# Altium PCB FP_A.PcbDoc (part 1 of 2)
Units mm, origin at the board's own origin, x right, y up, seen from the top; angles counter-clockwise.
Board outline 100 x 100 mm, 2 copper layers (Top Layer, Bottom Layer); 46 components, 104 nets, 431 pads, 841 vias.
Unrouted connection lines stored in the file: 843.
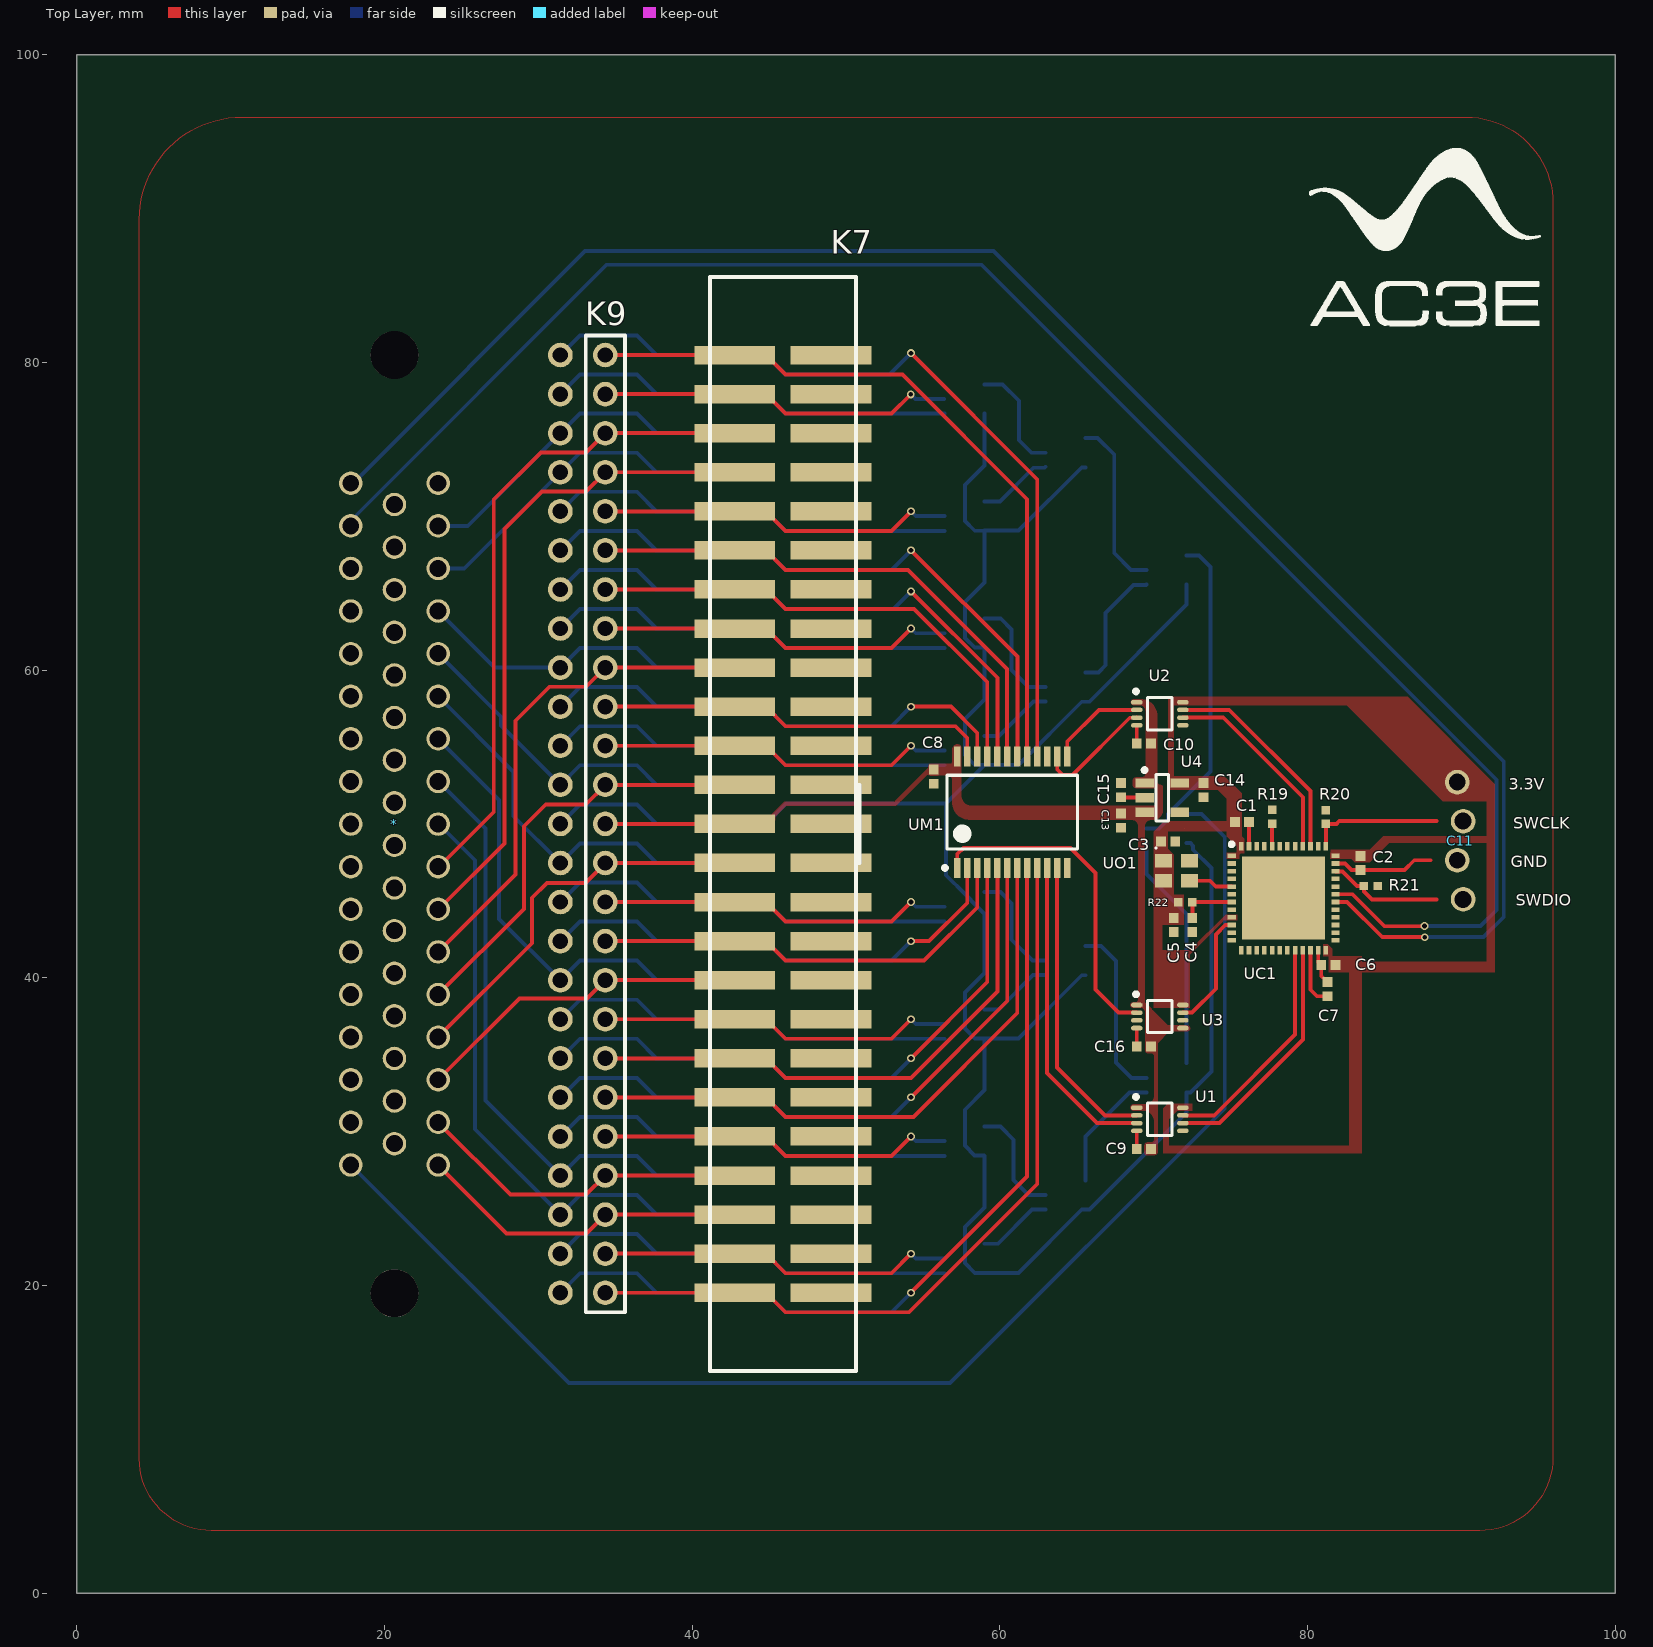
[diagram p0: Top Layer view]
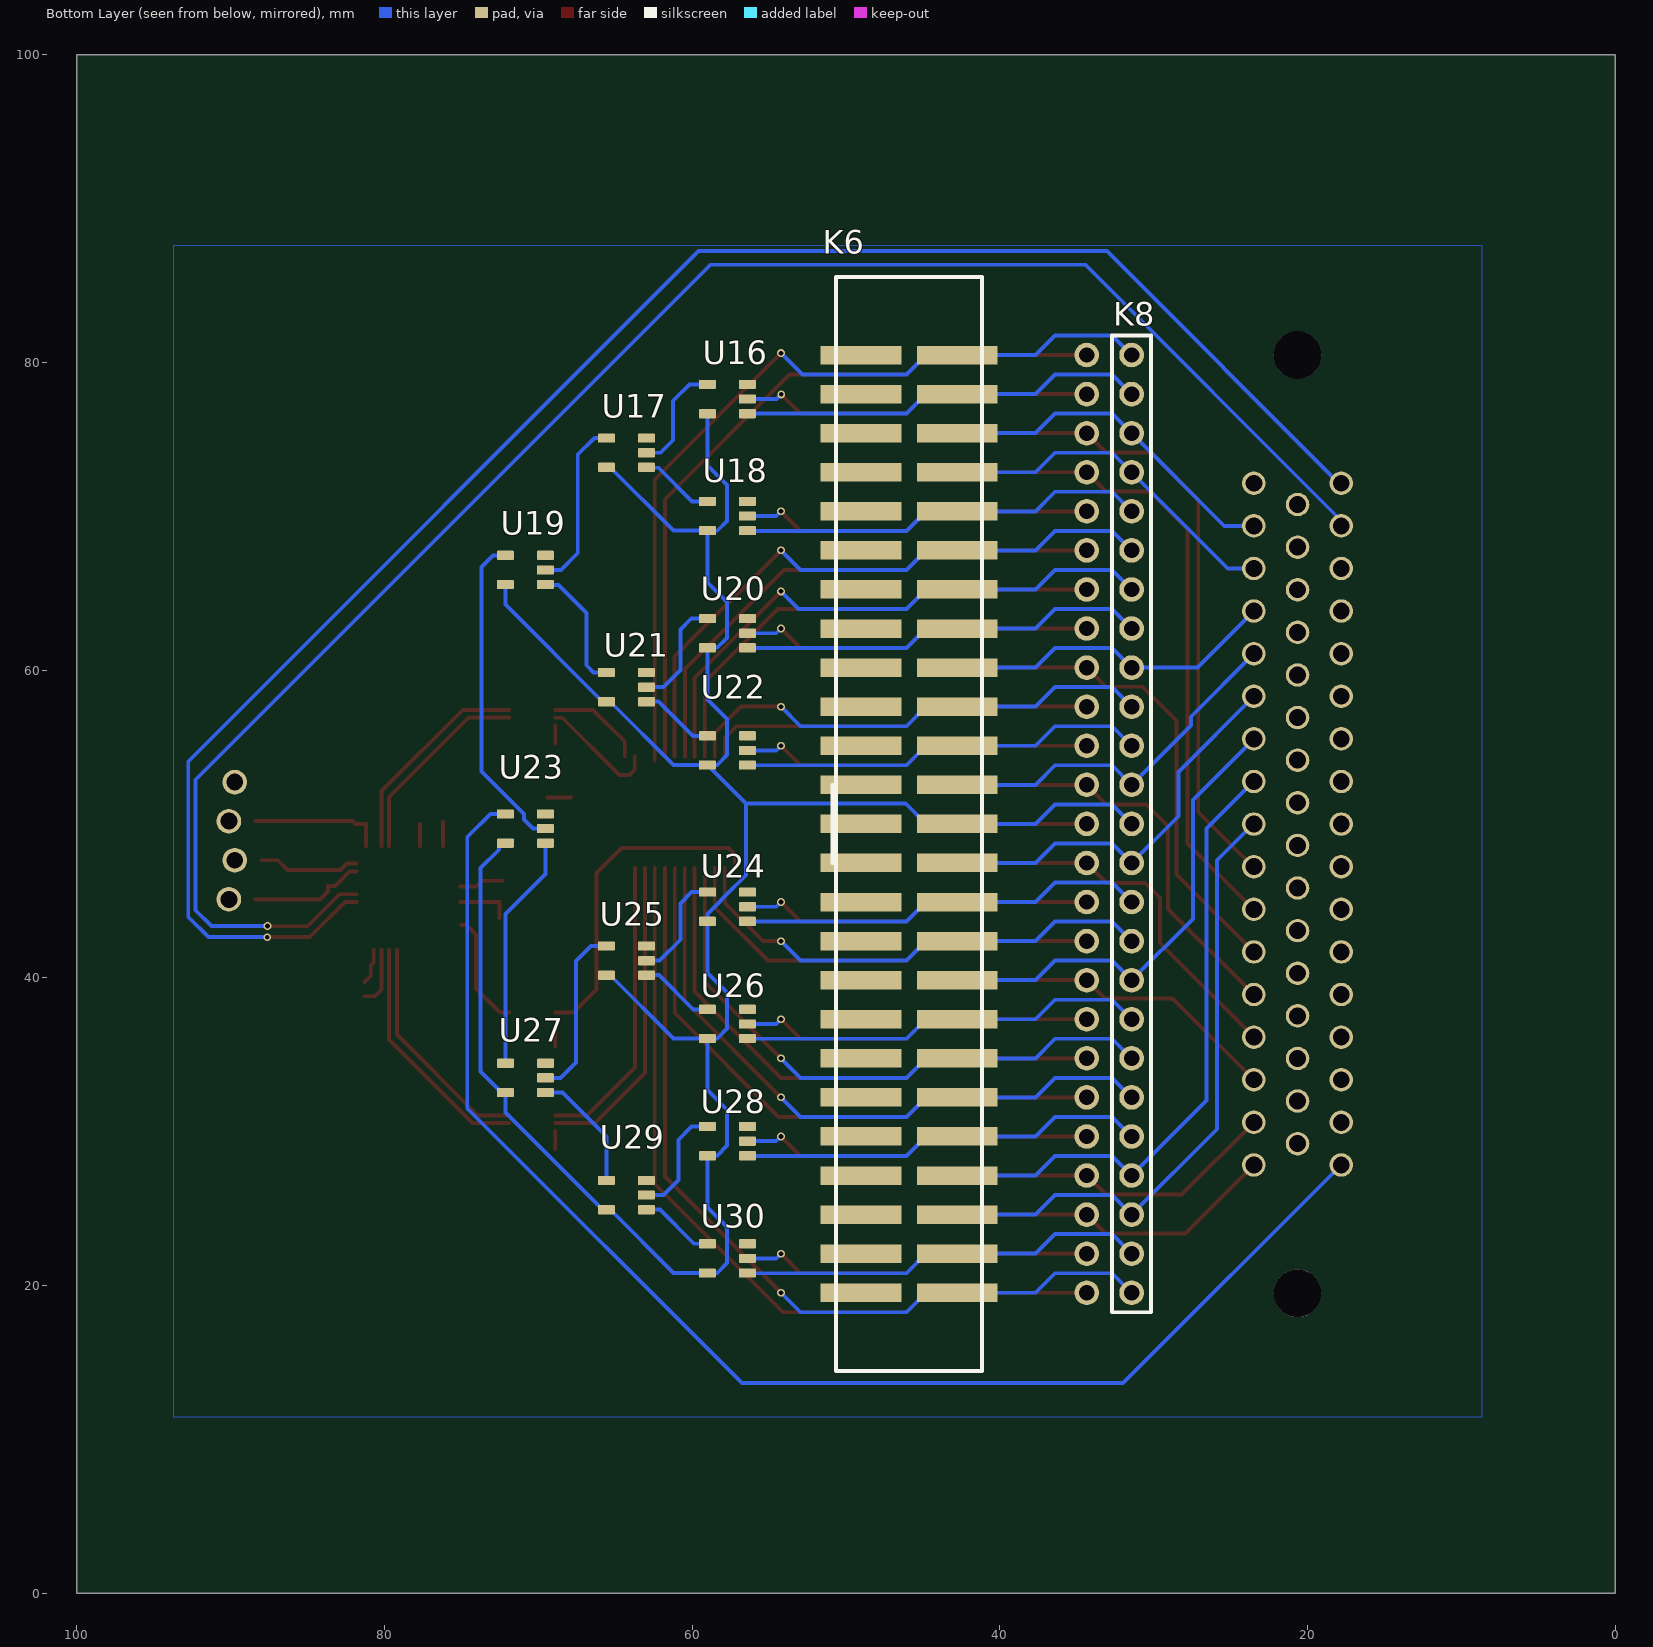
[diagram p1: Bottom Layer view, seen from below]
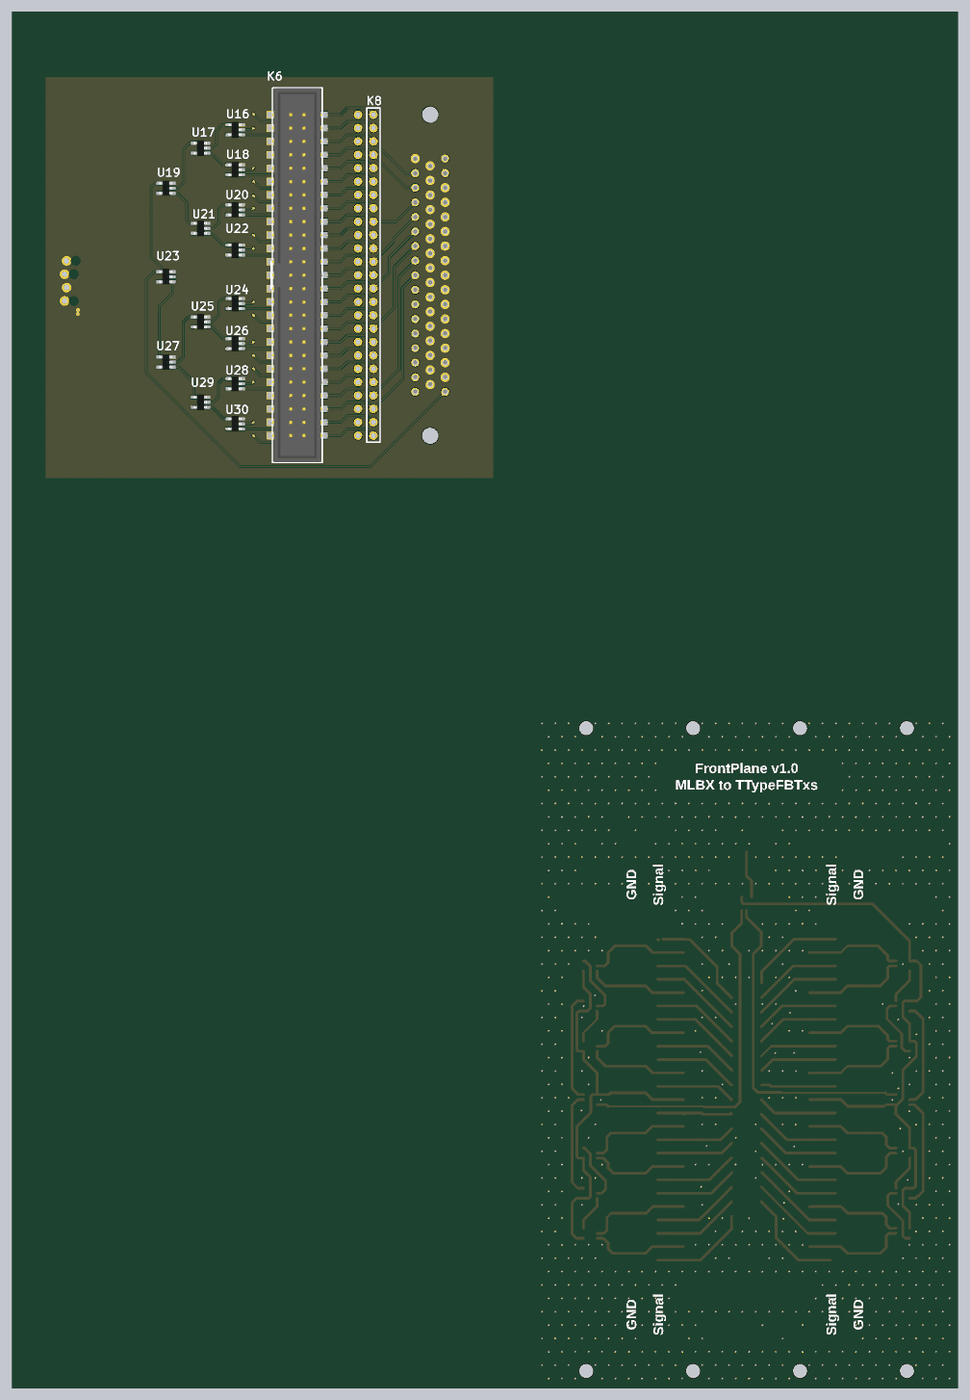
[diagram p3: 3D render of the assembled board from below, using the file's embedded part models]

## Layer stack, top to bottom
Top Solder: solder mask 0.0102, Solder Resist, Dk 3.5
Top Layer: signal copper 0.0356
Dielectric 1: dielectric 0.32, FR-4, Dk 4.8
Bottom Layer: signal copper 0.0356
Bottom Solder: solder mask 0.0102, Solder Resist, Dk 3.5

## Board outline
0,0.006 0,100.006 100,100.006 100,0.006

## Design rules (kind name [scope] priority, off if disabled: settings)
Clearance [All] p1: gap=0.152 ignorepadtopadclearanceinfootprint=FALSE
PlaneConnect [All] p1: pad.planeconnectstyle=Relief pad.reliefexpansion=0.508 pad.reliefentries=4 pad.reliefconductorwidth=0.254 pad.reliefairgap=0.254 via.planeconnectstyle=Direct via.reliefexpansion=0.508 via.reliefentries=4 via.reliefconductorwidth=0.254 via.reliefairgap=0.254
PolygonConnect [All] p1: connectstyle=Direct reliefconductorwidth=0.254 reliefentries=4 polygonreliefangle="90 Angle" airgapwidth=0.254
RoutingVias [All] p1: holewidth=0.711 width=1.27 viastyle="Through Hole" minholewidth=0.711 minwidth=1.27 maxholewidth=0.711 maxwidth=1.27
SolderMaskExpansion [All] p1: expansion=0.102 istentingtop=FALSE
Width [All] p1: maxlimit=1.27 minlimit=0.254 preferedwidth=0.254
29 further rules are at their usual default settings.

## Components (designator, comment, footprint, x,y, rotation, side; value= is the part's Value field where it differs from the comment)
* "163A11759X" 163A11759X 20.645,50 r270 top
C1 "C_100nF" CAPC1005X02N 75.738,50.133 r0 top
C2 "C_100nF" CAPC1005X02N 83.439,47.473 r90 top
C3 "C_100nF" CAPC1005X02N 70.949,48.87 r180 top
C4 "C_100nF" CAPC1005X02N 72.514,43.434 r90 top
C5 "C_100nF" CAPC1005X02N 71.302,43.434 r90 top
C6 "C_100nF" CAPC1005X02N 81.356,40.843 r180 top
C7 "C_4.7uF" CAPC1005X02N 81.305,39.268 r90 top
C8 "C_100nF" CAPC1005X02N 55.703,53.083 r270 top
C9 "C_100nF" CAPC1005X02N 69.364,28.884 r0 top locked
C10 "C_100nF" CAPC1005X02N 69.364,55.241 r0 top
C11 "test_pins" Test_pins 89.738,52.73 r270 top
C13 "C_100nF" CAPC1005X02N 67.884,50.223 r270 top
C14 "C_100nF" CAPC1005X02N 73.232,52.205 r270 top
C15 "C_100nF" CAPC1005X02N 67.884,52.204 r90 top
C16 "C_100nF" CAPC1005X02N 69.364,35.535 r0 top
K6 "3020-50-0300-00-TR" IDC_2x50 45.897,50.013 r270 bottom
K7 "3020-50-0300-00-TR" IDC_2x50 45.897,50.013 r90 top
K8 "PH_F_1x25" PH_F_1x25 31.433,77.953 r270 bottom
K9 "PH_F_1x25" PH_F_1x25 34.354,22.073 r90 top
R19 "R_40kOhm" Resist 77.698,50.47 r90 top
R20 "R_40kOhm" Resist 81.198,50.463 r90 top
R21 "R_40kOhm" Resist 84.118,45.974 r0 top
R22 "R_40kOhm" Resist 72.064,44.933 r180 top
U1 "SN74LXC2T45-Q1" SN74LXC2T45-Q1 70.403,30.81 r0 top locked
U2 "SN74LXC2T45-Q1" SN74LXC2T45-Q1 70.403,57.171 r0 top
U3 "SN74LXC2T45-Q1" SN74LXC2T45-Q1 70.403,37.49 r0 top locked
U4 "LDO" LDK120-5N-200mA 70.558,51.714 r0 top
U16 "OR Logic" sot23 59.008,77.633 r270 bottom
U17 "SN74LVC1G00" sot23 65.575,74.143 r270 bottom
U18 "SN74AHC1G32DBVR" sot23 59.008,70.029 r270 bottom
U19 "SN74LVC1G00" sot23 72.142,66.523 r270 bottom
U20 "SN74LVC1G00" sot23 59.008,62.408 r270 bottom
U21 "SN74LVC1G00" sot23 65.575,58.903 r270 bottom
U22 "SN74LVC1G00" sot23 59.008,54.788 r270 bottom
U23 "SN74LVC1G00" sot23 72.142,49.708 r270 bottom
U24 "SN74LVC1G00" sot23 59.008,44.628 r270 bottom
U25 "SN74LVC1G00" sot23 65.575,41.123 r270 bottom
U26 "SN74LVC1G00" sot23 59.008,37.008 r270 bottom
U27 "SN74LVC1G00" sot23 72.142,33.503 r270 bottom
U28 "SN74LVC1G00" sot23 59.008,29.388 r270 bottom
U29 "SN74LVC1G00" sot23 65.575,25.883 r270 bottom
U30 "SN74LVC1G00" sot23 59.008,21.768 r270 bottom
UC1 "STM32F401CCU6" STM32F401CCU6-UFQFPN48 78.448,45.187 r0 top
UM1 "CD74HC4067" CD74HC4067SM96 60.809,50.775 r90 top
UO1 "Oscil SG-210STF 25MHz" SG-210STF-25.0000M 71.479,46.965 r0 top

## Footprints (in the part's own frame and the unit in brackets; to place one, negate y for a bottom-side part, rotate by r counter-clockwise, add the part's x,y. Pads: shape width x height; smd on the part's side, far side on the other; paste and mask are expansions set on the pad)
163A11759X [mm]
  round 1.524 hole 1.1: 1(-22.16,2.84) 2(-19.39,2.84) 3(-16.62,2.84) 4(-13.85,2.84) 5(-11.08,2.84) 6(-8.31,2.84) 7(-5.54,2.84) 8(-2.77,2.84) 9(0,2.84) 10(2.77,2.84) 11(5.54,2.84) 12(8.31,2.84) 13(11.08,2.84) 14(13.85,2.84) 15(16.62,2.84) 16(19.39,2.84) 17(22.16,2.84) 18(-20.775,0) 19(-18.005,0) 20(-15.235,0) 21(-12.465,0) 22(-9.695,0) 23(-6.925,0) 24(-4.155,0) 25(-1.385,0) 26(1.385,0) 27(4.155,0) 28(6.925,0) 29(9.695,0) 30(12.465,0) 31(15.235,0) 32(18.005,0) 33(20.775,0) 34(-22.16,-2.84) 35(-19.39,-2.84) 36(-16.62,-2.84) 37(-13.85,-2.84) 38(-11.08,-2.84) 39(-8.31,-2.84) 40(-5.54,-2.84) 41(-2.77,-2.84) 42(0,-2.84) 43(2.77,-2.84) 44(5.54,-2.84) 45(8.31,-2.84) 46(11.08,-2.84) 47(13.85,-2.84) 48(16.62,-2.84) 49(19.39,-2.84) 50(22.16,-2.84)
  round 3.1 hole 3.1 unplated: ""(-30.5,0) ""(30.5,0)
  body extent -33.58,-16.59 33.52,5.15, height 16.68
CAPC1005X02N [mm] "Chip Capacitor, 2-Leads, Body 1,00x0,50mm, IPC Medium Density"
  rect 0.64x0.64 smd: 1(-0.46,0) 2(0.46,0)
  body extent -0.55,-0.3 0.55,0.3, height 0.2
CD74HC4067SM96 [mm]
  rect 1.31x0.45 smd: 1(-3.625,3.575) 2(-3.625,2.925) 3(-3.625,2.275) 4(-3.625,1.625) 5(-3.625,0.975) 6(-3.625,0.325) 7(-3.625,-0.325) 8(-3.625,-0.975) 9(-3.625,-1.625) 10(-3.625,-2.275) 11(-3.625,-2.925) 12(-3.625,-3.575) 13(3.625,-3.575) 14(3.625,-2.925) 15(3.625,-2.275) 16(3.625,-1.625) 17(3.625,-0.975) 18(3.625,-0.325) 19(3.625,0.325) 20(3.625,0.975) 21(3.625,1.625) 22(3.625,2.275) 23(3.625,2.925) 24(3.625,3.575)
  silkscreen extent -3.75,-4.25 2.4,4.5, body extent -3.9,-4.25 3.9,4.25, height 2
IDC_2x50 [mm]
  rect 1.2x5.25 smd: 1(-30.48,3.125) 2(-30.48,-3.125) 3(-27.94,3.125) 4(-27.94,-3.125) 5(-25.4,3.125) 6(-25.4,-3.125) 7(-22.86,3.125) 8(-22.86,-3.125) 9(-20.32,3.125) 10(-20.32,-3.125) 11(-17.78,3.125) 12(-17.78,-3.125) 13(-15.24,3.125) 14(-15.24,-3.125) 15(-12.7,3.125) 16(-12.7,-3.125) 17(-10.16,3.125) 18(-10.16,-3.125) 19(-7.62,3.125) 20(-7.62,-3.125) 21(-5.08,3.125) 22(-5.08,-3.125) 23(-2.54,3.125) 24(-2.54,-3.125) 25(0,3.125) 26(0,-3.125) 27(2.54,3.125) 28(2.54,-3.125) 29(5.08,3.125) 30(5.08,-3.125) 31(7.62,3.125) 32(7.62,-3.125) 33(10.16,3.125) 34(10.16,-3.125) 35(12.7,3.125) 36(12.7,-3.125) 37(15.24,3.125) 38(15.24,-3.125) 39(17.78,3.125) 40(17.78,-3.125) 41(20.32,3.125) 42(20.32,-3.125) 43(22.86,3.125) 44(22.86,-3.125) 45(25.4,3.125) 46(25.4,-3.125) 47(27.94,3.125) 48(27.94,-3.125) 49(30.48,3.125) 50(30.48,-3.125)
  silkscreen extent -35.56,-4.98 35.56,4.75, body extent -35.56,-4.8 35.56,4.8, height 10.32
LDK120-5N-200mA [mm] "SOT23, 5-Leads, Body 2,95x2,80mm, Pitch 0,95mm, IPC Medium Density"
  rect 1.2x0.6 smd: 1(-1.15,0.95) 2(-1.15,0) 3(-1.15,-0.95) 4(1.15,-0.95) 5(1.15,0.95)
  silkscreen extent -1.27,-1.5 0.4,1.92, body extent -1.45,-1.5 1.45,1.5, height 1.45
PH_F_1x25 [mm]
  round 1.6 hole 1: 1(-2.54,0) 2(0,0) 3(2.54,0) 4(5.08,0) 5(7.62,0) 6(10.16,0) 7(12.7,0) 8(15.24,0) 9(17.78,0) 10(20.32,0) 11(22.86,0) 12(25.4,0) 13(27.94,0) 14(30.48,0) 15(33.02,0) 16(35.56,0) 17(38.1,0) 18(40.64,0) 19(43.18,0) 20(45.72,0) 21(48.26,0) 22(50.8,0) 23(53.34,0) 24(55.88,0) 25(58.42,0)
  silkscreen extent -3.81,-1.27 59.69,1.27, body extent -3.81,-1.27 59.69,1.27, height 8
Resist [mm]
  rect 0.55x0.55 smd: 1(-0.45,0) 2(0.45,0)
  body extent -0.55,-0.27 0.55,0.28, height 0.3
SG-210STF-25.0000M [mm]
  rect 1.1x0.9 smd: 1(-0.85,0.65) 2(0.85,0.65) 3(0.85,-0.65) 4(-0.85,-0.65)
  silkscreen extent -1.37,1.43 -1.28,1.52, body extent -1.33,-1.07 1.4,1.08, height 0.8
SN74LXC2T45-Q1 [mm]
  oval 0.75x0.3 smd: 1(-1.499,0.75) 2(-1.499,0.25) 3(-1.499,-0.25) 4(-1.499,-0.75) 5(1.499,-0.75) 6(1.499,-0.25) 7(1.499,0.25) 8(1.499,0.75)
  silkscreen extent -1.67,-1.05 0.8,1.57, body extent -1.55,-1.05 1.55,1.05, height 0.9
sot23 [mm]
  rrect20% 0.6x1.1 smd mask+0.01: 1(0.95,2.6) 2(0,2.6) 3(-0.95,2.6) 4(-0.95,0) 5(0.95,0)
  body extent -1.5,0.02 1.5,2.52, height 1.11
STM32F401CCU6-UFQFPN48 [mm] "TSQFP, 48-Leads, Body 6,00x6,00mm, Pitch 0,50mm, Thermal Pad 5,40x5,40mm, IPC Medium Density"
  rect 0.55x0.3 smd mask+0.05: 1(-3.375,2.75) 2(-3.375,2.25) 3(-3.375,1.75) 4(-3.375,1.25) 5(-3.375,0.75) 6(-3.375,0.25) 7(-3.375,-0.25) 8(-3.375,-0.75) 9(-3.375,-1.25) 10(-3.375,-1.75) 11(-3.375,-2.25) 12(-3.375,-2.75) 25(3.375,-2.75) 26(3.375,-2.25) 27(3.375,-1.75) 28(3.375,-1.25) 29(3.375,-0.75) 30(3.375,-0.25) 31(3.375,0.25) 32(3.375,0.75) 33(3.375,1.25) 34(3.375,1.75) 35(3.375,2.25) 36(3.375,2.75)
  rect 0.3x0.55 smd mask+0.05: 13(-2.75,-3.375) 14(-2.25,-3.375) 15(-1.75,-3.375) 16(-1.25,-3.375) 17(-0.75,-3.375) 18(-0.25,-3.375) 19(0.25,-3.375) 20(0.75,-3.375) 21(1.25,-3.375) 22(1.75,-3.375) 23(2.25,-3.375) 24(2.75,-3.375) 37(2.75,3.375) 38(2.25,3.375) 39(1.75,3.375) 40(1.25,3.375) 41(0.75,3.375) 42(0.25,3.375) 43(-0.25,3.375) 44(-0.75,3.375) 45(-1.25,3.375) 46(-1.75,3.375) 47(-2.25,3.375) 48(-2.75,3.375)
  rect 5.4x5.4 smd mask+0.05: 49(0,0)
  silkscreen extent -3.5,3.38 -3.25,3.62, body extent -3.64,-3.64 3.64,3.64, height 0.6
Test_pins [mm]
  round 1.6 hole 1.1: 1(0,0) 2(2.54,0.381) 3(5.08,0) 4(7.62,0.381)

## Part data
U16: library part SN74AHC1G32DBVR

## Free pads (board coordinates)
  round 2.7 hole 2.7 unplated: ""(-69.977,-158.14) ""(-69.977,-36.04) ""(-49.657,-158.14) ""(-49.657,-36.04) ""(-29.337,-158.14) ""(-29.337,-36.04) ""(-9.017,-158.14) ""(-9.017,-36.04)

## Via types
v1: diameter 0.45, hole 0.3, Top Layer to Bottom Layer, tented both sides, 823 vias
v2: diameter 0.5, hole 0.3, Top Layer to Bottom Layer, 18 vias

## Nets (pads, with @x,y where several pads share a name; then routed paths per layer and width w, separated by ;. In a path a pad name is that pad's centre, name@x,y a point inside that pad or via, vN(x,y) a via of type N, cw(c..) or ccw(c..) an arc to the next point about the centre after c; other vN are vias at no path point)
3.3V: C1.1 C2.2 C3.2 C5.2 C6.1 C11.1 C14.1 R22.2 U1.8 U2.8 U3.8 U4.5 UC1.1 UC1.9 UC1.24 UC1.36 UC1.48 UO1.1 UO1.4
5V_C1: K6.25 K8.13 U16.5 U17.5 U18.5 U19.5 U20.5 U21.5 U22.5 U23.5 U24.5 U25.5 U26.5 U27.5 U28.5 U29.5 U30.5 | length 165
  Bottom Layer w0.254: K8.13@31.433,50.013 32.703,51.283 36.411,51.283 37.681,50.013 K6.25@42.772,50.013 44.797,50.013 46.118,51.333 56.504,51.333 ; U28.5@58.988,28.458 58.359,28.458 57.724,29.093 57.724,31.43 58.998,32.704 U26.5@58.998,36.068 ; U30.5@58.998,20.828 58.369,20.828 57.734,21.463 57.734,23.8 59.008,25.074 U28.5@59.008,28.438 ; U22.5@58.998,53.848 58.369,53.848 57.734,54.483 57.734,56.82 59.008,58.094 U20.5@59.008,61.458 ; U20.5@58.998,61.469 58.369,61.469 57.734,62.104 57.734,64.441 59.008,65.714 U18.5@59.008,69.079 61.21,69.078 65.325,73.193 U17.5@65.575,73.193 ; U18.5@58.998,69.073 58.369,69.073 57.734,69.708 57.734,72.045 59.008,73.318 U16.5@59.008,76.683 ; U30.5@59.008,20.818 61.21,20.818 65.325,24.933 U29.5@65.575,24.933 65.825,24.933 72.142,31.25 U27.5@72.142,32.553 72.392,32.553 73.762,33.923 73.762,47.138 72.565,48.335 72.565,48.585 72.392,48.758 U23.5@72.142,48.758 ; U25.5@65.575,40.173 65.325,40.173 61.21,36.058 U26.5@59.008,36.058 U26.5@58.998,36.068 ; U19.5@72.142,65.573 72.142,64.27 65.825,57.953 U21.5@65.575,57.953 65.325,57.953 61.21,53.838 U22.5@59.008,53.838 56.504,51.333 ; 56.504,51.333 56.504,46.671 57.018,46.157 57.038,46.157 57.237,45.958 57.237,45.938 59.008,44.167 U24.5@59.008,43.678 59.008,40.314 57.734,39.04 57.734,36.703 58.369,36.068 U26.5@58.998,36.068
5V_C2: C8.1 C9.2 C10.2 C13.1 C16.2 K7.25 K9.13 U1.1 U2.1 U3.1 U3.5 U4.1 U4.3 UM1.24 | length 8.4
  Top Layer w0.254: K9.13@34.354,50.013 K7.25@42.772,50.013
DIO1_ch1_T_K3_L1: K6.49 K8.25 UM1.8 | length 55.6
  Top Layer w0.254: v2@54.216,19.545 61.773,27.102 UM1.8@61.773,47.15
  Bottom Layer w0.254: K8.25@31.433,19.533 32.703,20.803 36.411,20.803 37.681,19.533 K6.49@42.772,19.533 44.797,19.533 46.067,18.263 52.959,18.263 v2(54.229,19.533)
DIO1_ch2_P_K3_L1: *.9 K6.45 K8.23 | length 41.1
  Bottom Layer w0.254: *.9@23.509,50.024 25.883,47.65 25.883,30.163 K8.23@31.433,24.613 32.703,25.883 36.411,25.883 37.681,24.613 K6.45@42.772,24.613
DIO1_ch3_P_K4_H1: *.8 K6.43 K8.22 | length 41.3
  Bottom Layer w0.254: *.8@23.496,52.78 26.568,49.708 26.568,32.018 K8.22@31.433,27.153 32.703,28.423 36.411,28.423 37.681,27.153 K6.43@42.772,27.153
DIO1_ch4_T_K4_H1: K6.39 K8.20 UM1.6 | length 42.4
  Top Layer w0.254: v2(54.229,32.233) 60.484,38.488 UM1.6@60.484,47.15
  Bottom Layer w0.254: K8.20@31.433,32.233 32.703,33.503 36.411,33.503 37.681,32.233 K6.39@42.772,32.233 44.797,32.233 46.067,30.963 52.959,30.963 v2(54.229,32.233)
DIO1_ch5_T_K6_H1: K6.37 K8.19 UM1.4 | length 39.3
  Top Layer w0.254: v2(54.229,34.773) 59.184,39.728 UM1.4@59.184,47.15
  Bottom Layer w0.254: K8.19@31.433,34.773 32.703,36.043 36.411,36.043 37.681,34.773 K6.37@42.772,34.773 44.797,34.773 46.067,33.503 52.959,33.503 v2(54.229,34.773)
DIO1_ch6_P_K6_H1: *.7 K6.33 K8.17 | length 31.4
  Bottom Layer w0.254: *.7@23.483,55.537 27.452,51.567 27.452,43.834 K8.17@31.433,39.853 32.703,41.123 36.411,41.123 37.681,39.853 K6.33@42.772,39.853
DIO1_ch7_T_K6_L1: K6.31 K8.16 UM1.2 | length 31.9
  Top Layer w0.254: v2(54.229,42.393) 55.397,42.393 57.884,44.879 UM1.2@57.884,47.15
  Bottom Layer w0.254: K8.16@31.433,42.393 32.703,43.663 36.411,43.663 37.681,42.393 K6.31@42.772,42.393 44.797,42.393 46.067,41.123 52.959,41.123 v2(54.229,42.393)
DIO1_ch8_P_K6_L1: *.6 K6.27 K8.14 | length 26.5
  Bottom Layer w0.254: *.6@23.485,58.31 28.397,53.398 28.397,50.509 K8.14@31.433,47.473 32.703,48.743 36.411,48.743 37.681,47.473 K6.27@42.772,47.473
DIO1_ch9_P_K5_L1: *.5 K6.23 K8.12 | length 24.2
  Bottom Layer w0.254: *.5@23.485,61.08 27.584,56.981 27.584,56.402 K8.12@31.433,52.553 32.703,53.823 36.411,53.823 37.681,52.553 K6.23@42.772,52.553
DIO1_ch10_T_K5_L1: K6.19 K8.10 UM1.22 | length 31.4
  Top Layer w0.254: v2(54.229,57.633) 56.82,57.633 58.534,55.918 UM1.22@58.534,54.4
  Bottom Layer w0.254: K8.10@31.433,57.633 32.703,58.903 36.411,58.903 37.681,57.633 K6.19@42.772,57.633 44.797,57.633 46.067,56.363 52.959,56.363 v2(54.229,57.633)
DIO1_ch11_P_K5_H1: *.4 K6.17 K8.9 | length 21.9
  Bottom Layer w0.254: *.4@23.485,63.85 27.162,60.173 K8.9@31.433,60.173 32.703,61.443 36.411,61.443 37.681,60.173 K6.17@42.772,60.173
DIO1_ch12_T_K5_H1: K6.13 K8.7 UM1.20 | length 37.9
  Top Layer w0.254: v2(54.229,65.126) 59.842,59.512 UM1.20@59.842,54.4
  Bottom Layer w0.254: K8.7@31.433,65.253 32.703,66.523 36.411,66.523 37.681,65.253 K6.13@42.772,65.253 44.797,65.253 46.067,63.983 53.086,63.983 v2(54.229,65.126)
DIO1_ch13_T_K2_H1: K6.11 K8.6 UM1.18 | length 41.2
  Top Layer w0.254: v2(54.229,67.793) 61.138,60.884 UM1.18@61.138,54.4
  Bottom Layer w0.254: K8.6@31.433,67.793 32.703,69.063 36.411,69.063 37.681,67.793 K6.11@42.772,67.793 44.797,67.793 46.067,66.523 52.959,66.523 v2(54.229,67.793)
DIO1_ch14_P_K2_H1: *.3 K6.7 K8.4 | length 22.9
  Bottom Layer w0.254: *.3@23.485,66.62 25.18,66.62 K8.4@31.433,72.873 32.703,74.143 36.411,74.143 37.681,72.873 K6.7@42.772,72.873
DIO1_ch15_P_K1_L1: *.2 K6.5 K8.3 | length 22.8
  Bottom Layer w0.254: *.2@23.485,69.39 25.41,69.39 K8.3@31.433,75.413 32.703,76.683 36.411,76.683 37.681,75.413 K6.5@42.772,75.413
DIO1_ch16_T_K1_L1: K6.1 K8.1 UM1.16 | length 54.9
  Top Layer w0.254: v2(54.229,80.62) 62.434,72.415 UM1.16@62.434,54.4 UM1.16@62.434,54.115
  Bottom Layer w0.254: K8.1@31.433,80.493 32.703,81.763 36.411,81.763 37.681,80.493 K6.1@42.772,80.493 44.797,80.493 46.067,79.223 52.832,79.223 v2(54.229,80.62)
DIO1_ch17_T_K1_L2: K7.1 K9.1 UM1.9 | length 52.6
  Top Layer w0.254: K9.1@34.354,19.533 K7.1@42.772,19.533 ; K7.1@42.772,19.533 44.797,19.533 46.067,18.263 54.102,18.263 62.433,26.594 UM1.9@62.434,47.15
DIO1_ch18_P_K1_L2: *.17 K7.5 K9.3 | length 21.6
  Top Layer w0.254: *.17@23.485,27.84 27.932,23.393 33.134,23.393 K9.3@34.354,24.613 K7.5@42.772,24.613
DIO1_ch19_P_K2_H2: *.16 K7.7 K9.4 | length 21.7
  Top Layer w0.254: *.16@23.485,30.61 28.187,25.908 33.109,25.908 K9.4@34.354,27.153 K7.7@42.772,27.153
DIO1_ch20_T_K2_H2: K7.11 K9.6 UM1.7 | length 39.5
  Top Layer w0.254: K9.6@34.354,32.233 K7.11@42.772,32.233 ; K7.11@42.772,32.233 44.797,32.233 46.067,30.963 54.381,30.963 61.134,37.715 UM1.7@61.134,47.15
DIO1_ch21_T_K5_H2: K7.13 K9.7 UM1.5 | length 36.4
  Top Layer w0.254: K9.7@34.354,34.773 K7.13@42.772,34.773 ; K7.13@42.772,34.773 44.797,34.773 46.067,33.503 54.229,33.503 59.842,39.116 UM1.5@59.842,47.15
DIO1_ch22_P_K5_H2: *.15 K7.17 K9.9 | length 22
  Top Layer w0.254: *.15@23.485,33.38 28.765,38.659 33.16,38.659 K9.9@34.354,39.853 K7.17@42.772,39.853
DIO1_ch23_T_K5_L2: K7.19 K9.10 UM1.3 | length 28.7
  Top Layer w0.254: K9.10@34.354,42.393 K7.19@42.772,42.393 ; K7.19@42.772,42.393 44.797,42.393 46.067,41.123 55.067,41.123 58.534,44.589 UM1.3@58.534,47.15
DIO1_ch24_P_K5_L2: *.14 K7.23 K9.12 | length 25.7
  Top Layer w0.254: *.14@23.485,36.15 29.589,42.253 29.589,45.21 30.556,46.177 33.058,46.177 K9.12@34.354,47.473 K7.23@42.772,47.473
DIO1_ch25_P_K6_L2: *.13 K7.27 K9.14 | length 28.1
  Top Layer w0.254: *.13@23.485,38.92 29.056,44.49 29.056,49.858 30.48,51.283 33.084,51.283 K9.14@34.354,52.553 K7.27@42.772,52.553
DIO1_ch26_T_K6_L2: K7.31 K9.16 UM1.23 | length 25.6
  Top Layer w0.254: K9.16@34.354,57.633 K7.31@42.772,57.633 ; K7.31@42.772,57.633 44.797,57.633 46.067,56.363 57.125,56.363 57.884,55.603 UM1.23@57.884,54.4
DIO1_ch27_P_K6_H2: *.12 K7.33 K9.17 | length 32.8
  Top Layer w0.254: *.12@23.485,41.69 28.522,46.726 28.522,56.716 30.734,58.928 33.109,58.928 K9.17@34.354,60.173 K7.33@42.772,60.173
DIO1_ch28_T_K6_H2: K7.37 K9.19 UM1.21 | length 32.2
  Top Layer w0.254: K9.19@34.354,65.253 K7.37@42.772,65.253 ; K7.37@42.772,65.253 44.797,65.253 46.067,63.983 54.432,63.983 59.184,59.231 UM1.21@59.184,54.4
DIO1_ch29_T_K4_H2: K7.39 K9.20 UM1.19 | length 35
  Top Layer w0.254: K9.20@34.354,67.793 K7.39@42.772,67.793 ; K7.39@42.772,67.793 44.797,67.793 46.067,66.523 54.026,66.523 60.477,60.071 UM1.19@60.477,54.4
DIO1_ch30_P_K4_H2: *.11 K7.43 K9.22 | length 43
  Top Layer w0.254: *.11@23.495,44.45 27.788,48.743 27.788,69.19 30.226,71.628 33.109,71.628 K9.22@34.354,72.873 K7.43@42.772,72.873
DIO1_ch31_P_K3_L2: *.10 K7.45 K9.23 | length 42.8
  Top Layer w0.254: *.10@23.521,47.194 27.102,50.775 27.102,71.095 30.175,74.168 33.109,74.168 K9.23@34.354,75.413 K7.45@42.772,75.413
DIO1_ch32_T_K3_L2: K7.49 K9.25 UM1.17 | length 46
  Top Layer w0.254: K9.25@34.354,80.493 K7.49@42.772,80.493 ; K7.49@44.797,80.493 46.067,79.223 53.67,79.223 61.773,71.12 UM1.17@61.773,54.4
E_K1_L1: K6.3 K8.2 U16.1 | length 26.6
  Bottom Layer w0.254: K8.2@31.433,77.953 32.703,79.223 36.411,79.223 37.681,77.953 K6.3@42.772,77.953 44.797,77.953 46.067,76.683 U16.1@56.408,76.683
E_K1_L2: K7.3 K9.2 U30.2 | length 23.2
  Top Layer w0.254: K9.2@34.354,22.073 K7.3@42.772,22.073 ; K7.3@42.772,22.073 44.797,22.073 46.067,20.803 52.959,20.803 v2(54.229,22.073)
  Bottom Layer w0.254: v2(54.229,22.073) 54.534,21.768 U30.2@56.408,21.768
E_K2_H1: K6.9 K8.5 U18.1 | length 26.6
  Bottom Layer w0.254: K8.5@31.433,70.333 31.438,70.333 32.708,71.603 36.411,71.603 37.681,70.333 K6.9@42.772,70.333 44.797,70.333 46.067,69.063 U18.1@56.418,69.063
E_K2_H2: K7.9 K9.5 U28.2 | length 23.2
  Top Layer w0.254: K9.5@34.354,29.693 K7.9@42.772,29.693 ; K7.9@42.772,29.693 44.797,29.693 46.067,28.423 52.959,28.423 v2(54.229,29.693)
  Bottom Layer w0.254: v2(54.229,29.693) 54.534,29.388 U28.2@56.408,29.388
E_K3_L1: K6.47 K8.24 U30.1 | length 26.6
  Bottom Layer w0.254: K8.24@31.433,22.073 32.703,23.343 36.411,23.343 37.681,22.073 K6.47@42.772,22.073 44.797,22.073 46.067,20.803 U30.1@56.408,20.803
E_K3_L2: K7.47 K9.24 U16.2 | length 23.2
  Top Layer w0.254: K9.24@34.354,77.953 K7.47@42.772,77.953 ; K7.47@42.772,77.953 44.797,77.953 46.067,76.683 52.959,76.683 v2(54.21,77.934)
  Bottom Layer w0.254: v2(54.21,77.934) 54.515,77.629 U16.2@56.389,77.629
E_K4_H1: K6.41 K8.21 U28.1 | length 26.6
  Bottom Layer w0.254: K8.21@31.433,29.693 32.703,30.963 36.411,30.963 37.681,29.693 K6.41@42.772,29.693 44.797,29.693 46.067,28.423 U28.1@56.408,28.423
E_K4_H2: K7.41 K9.21 U18.2 | length 23.2
  Top Layer w0.254: K9.21@34.354,70.333 K7.41@42.772,70.333 ; K7.41@42.772,70.333 44.797,70.333 46.067,69.063 52.959,69.063 v2(54.229,70.333)
  Bottom Layer w0.254: v2(54.229,70.333) 54.534,70.028 U18.2@56.408,70.029
E_K5_H1: K6.15 K8.8 U20.1 | length 26.6
  Bottom Layer w0.254: K8.8@31.433,62.713 32.703,63.983 36.411,63.983 37.681,62.713 K6.15@42.772,62.713 44.797,62.713 46.067,61.443 U20.1@56.408,61.443
E_K5_H2: K7.15 K9.8 U26.2 | length 23.2
  Top Layer w0.254: K9.8@34.354,37.313 K7.15@42.772,37.313 ; K7.15@42.772,37.313 44.797,37.313 46.067,36.043 52.959,36.043 v2(54.229,37.313)
  Bottom Layer w0.254: v2(54.229,37.313) 54.534,37.008 U26.2@56.408,37.008
E_K5_L1: K6.21 K8.11 U22.1 | length 26.6
  Bottom Layer w0.254: K8.11@31.433,55.093 32.703,56.363 36.411,56.363 37.681,55.093 K6.21@42.772,55.093 44.797,55.093 46.067,53.823 U22.1@56.408,53.823
E_K5_L2: K7.21 K9.11 U24.2 | length 23.2
  Top Layer w0.254: K9.11@34.354,44.933 K7.21@42.772,44.933 ; K7.21@42.772,44.933 44.797,44.933 46.067,43.663 52.959,43.663 v2(54.229,44.933)
  Bottom Layer w0.254: v2(54.229,44.933) 54.534,44.628 U24.2@56.408,44.628
E_K6_H1: K6.35 K8.18 U26.1 | length 26.6
  Bottom Layer w0.254: K8.18@31.433,37.313 32.703,38.583 36.411,38.583 37.681,37.313 K6.35@42.772,37.313 44.797,37.313 46.067,36.043 U26.1@56.408,36.043
E_K6_H2: K7.35 K9.18 U20.2 | length 23.2
  Top Layer w0.254: K9.18@34.354,62.713 K7.35@42.772,62.713 ; K7.35@42.772,62.713 44.797,62.713 46.067,61.443 52.959,61.443 v2(54.229,62.713)
  Bottom Layer w0.254: v2(54.229,62.713) 54.534,62.408 U20.2@56.408,62.408
E_K6_L1: K6.29 K8.15 U24.1 | length 26.6
  Bottom Layer w0.254: K8.15@31.433,44.933 32.703,46.203 36.411,46.203 37.681,44.933 K6.29@42.772,44.933 44.797,44.933 46.067,43.663 U24.1@56.408,43.663
E_K6_L2: K7.29 K9.15 U22.2 | length 23.2
  Top Layer w0.254: K9.15@34.354,55.093 K7.29@42.772,55.093 ; K7.29@42.772,55.093 44.797,55.093 46.067,53.823 52.959,53.823 v2(54.229,55.093)
  Bottom Layer w0.254: v2(54.229,55.093) 54.534,54.788 U22.2@56.408,54.788
ERR: *.50 U23.4 | length 90.8
  Bottom Layer w0.254: *.50@17.805,27.84 31.98,13.665 56.769,13.665 74.625,31.521 74.625,49.149 73.116,50.658 U23.4@72.142,50.658